# EAGLE board MRCS-Adapter-CRMI8-RJ45-Inverting-Array (EAGLE 7.7.0)
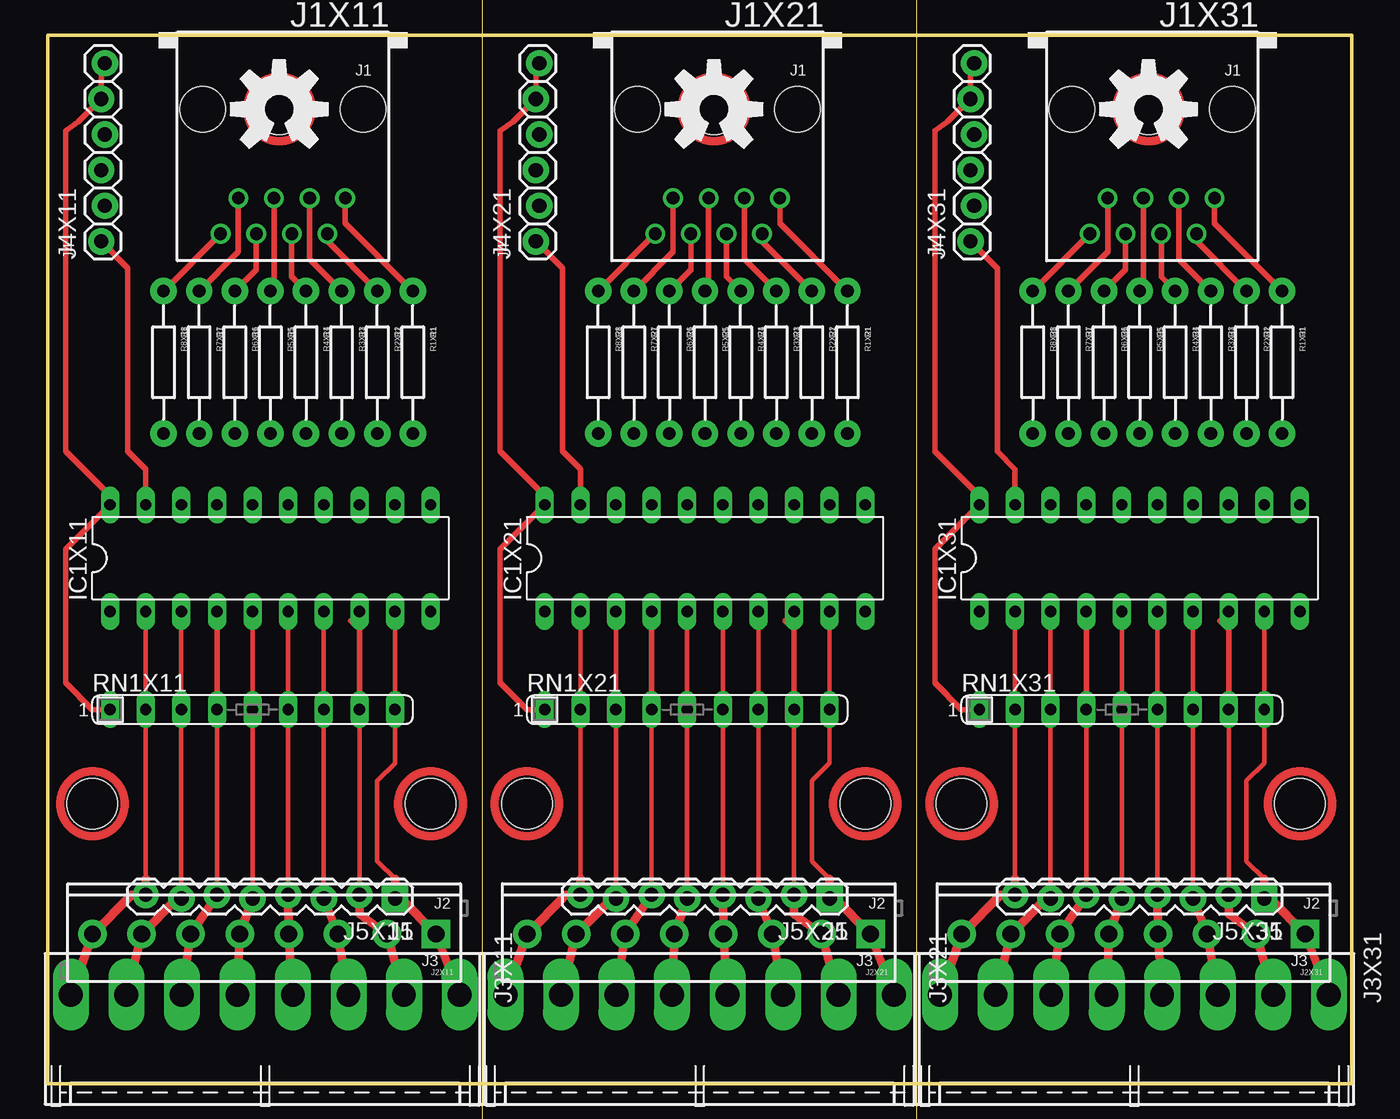
[diagram p0: board, top side]
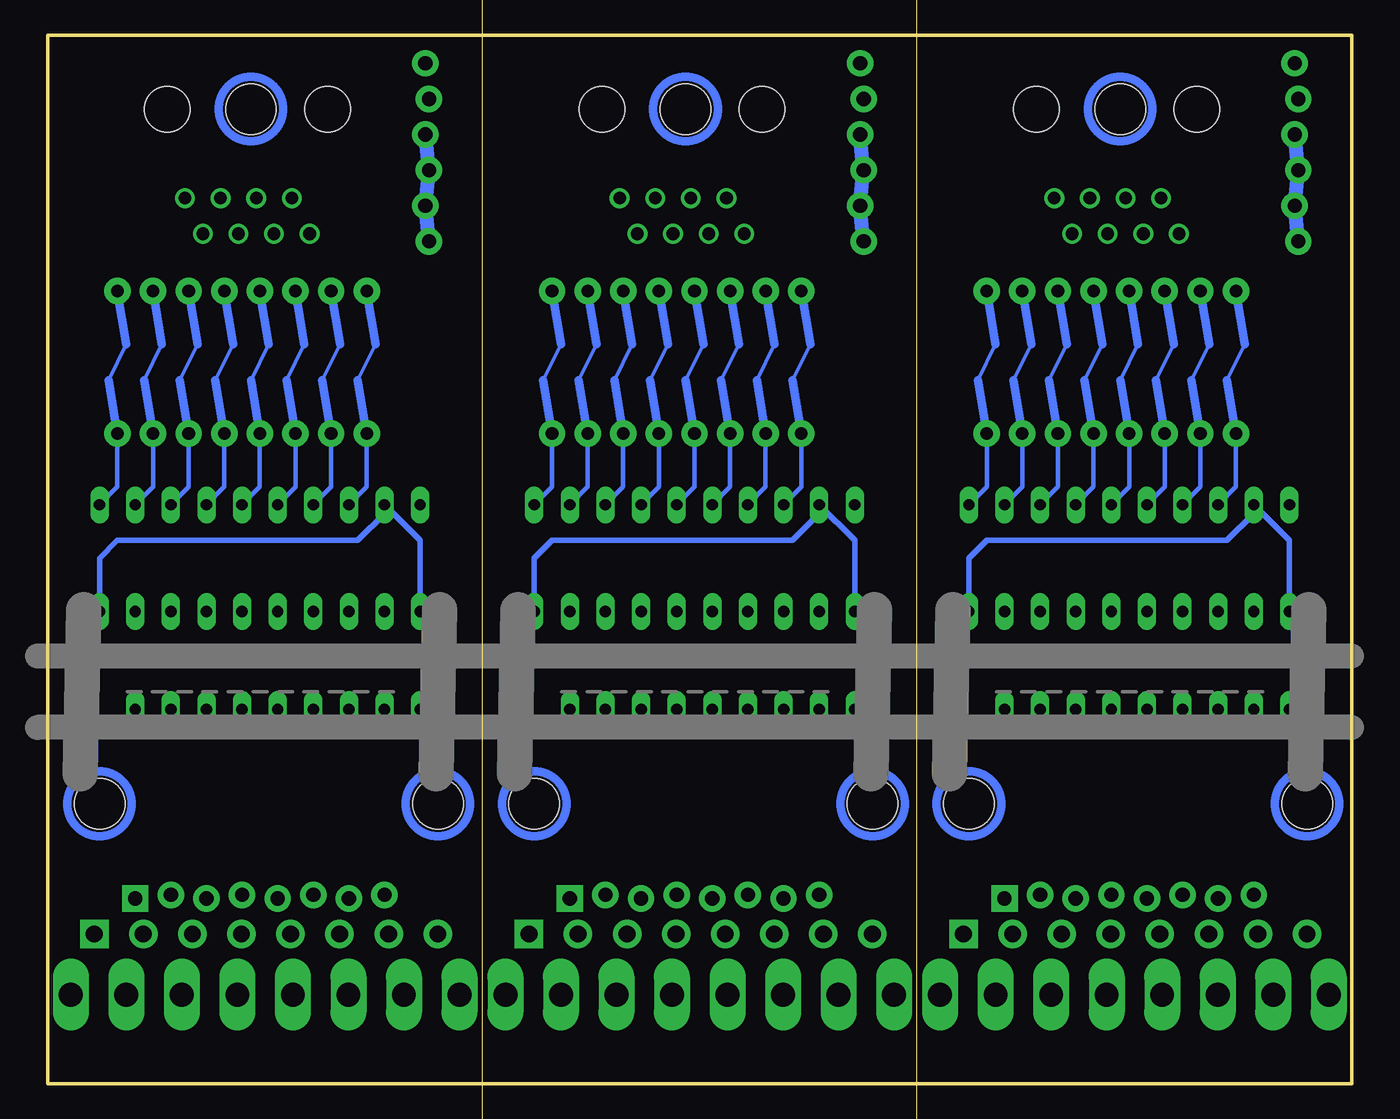
[diagram p1: board, bottom side, seen from below]

Size 93 x 74.77 mm. Coordinates in mm from the lower left corner, seen from the top.
Outline: 0,0 93,0 93,74.77 0,74.77 0,0
Copper layers (1*16): Top 0.035mm / dielectric 1.5mm / Bottom 0.035mm
Design rules "default": minimum track width 10mil, minimum drill 24mil, track to track 8mil, track to pad 8mil, pad to pad 8mil, via to via 8mil, smd to smd 8mil, copper to edge 40mil, drill to drill 8mil, minimum pad ring 10mil, minimum via ring 8mil, stop-mask expansion 4mil, vias tented up to drill 0mil, thermal gap 10mil
Milling: 2 lines

## Footprints (pad centres in the part's own frame; a part is rotated, then mirrored left to right if it is on the bottom)
DIL20 = drill 0.813 long: 1 -11.43,-3.81; 2 -8.89,-3.81; 3 -6.35,-3.81; 4 -3.81,-3.81; 5 -1.27,-3.81; 6 1.27,-3.81; 7 3.81,-3.81; 8 6.35,-3.81; 9 8.89,-3.81; 10 11.43,-3.81; 11 11.43,3.81; 12 8.89,3.81; 13 6.35,3.81; 14 3.81,3.81; 15 1.27,3.81; 16 -1.27,3.81; 17 -3.81,3.81; 18 -6.35,3.81; 19 -8.89,3.81; 20 -11.43,3.81
RJ45-NO-SHIELD = drill 0.9 pad 1.4: 1 -4.445,6.35; 2 -3.175,8.89; 3 -1.905,6.35; 4 -0.635,8.89; 5 0.635,6.35; 6 1.905,8.89; 7 3.175,6.35; 8 4.445,8.89 | hole 3.251: -5.715,0; 5.715,0
SCREWTERMINAL-3.5MM-8 = drill 1.2 pad 2.032 square: 1 0,0 | drill 1.2 pad 2.032: 2 3.5,0; 3 7,0; 4 10.5,0; 5 14,0; 6 17.5,0; 7 21,0; 8 24.5,0
KK-156-8-F = drill 1.7 pad 2.184 long: 1 -13.86,0; 2 -9.9,0; 3 -5.94,0; 4 -1.98,0; 5 1.98,0; 6 5.94,0; 7 9.9,0; 8 13.86,0
1X06_LOCK = drill 1.016 pad 1.88: 1 0,0; 2 2.54,-0.254; 3 5.08,0; 4 7.62,-0.254; 5 10.16,0; 6 12.7,-0.254
1X08_LOCK = drill 1.016 pad 1.88 square: 1 0,0.127 | drill 1.016 pad 1.88: 2 2.54,-0.127; 3 5.08,0.127; 4 7.62,-0.127; 5 10.16,0.127; 6 12.7,-0.127; 7 15.24,0.127; 8 17.78,-0.127
MOUNTINGHOLE = hole 3.6: 0,0
AXIAL-0.4-RES = drill 0.9 pad 1.88: P$1 -5.08,0; P$2 5.08,0
SIL9 = drill 0.813 long: 1 -10.16,0; 2 -7.62,0; 3 -5.08,0; 4 -2.54,0; 5 0,0; 6 2.54,0; 7 5.08,0; 8 7.62,0; 9 10.16,0

## Placement (x,y rotation side)
IC1X11  74LS540N  [DIL20]  15.88,37.47 0 top
IC1X21  74LS540N  [DIL20]  46.88,37.47 0 top
IC1X31  74LS540N  [DIL20]  77.88,37.47 0 top
J1X11  RJ45  [RJ45-NO-SHIELD]  16.77,69.48 180 top
J1X21  RJ45  [RJ45-NO-SHIELD]  47.77,69.48 180 top
J1X31  RJ45  [RJ45-NO-SHIELD]  78.77,69.48 180 top
J2X11  [SCREWTERMINAL-3.5MM-8]  27.69,10.67 180 top
J2X21  [SCREWTERMINAL-3.5MM-8]  58.69,10.67 180 top
J2X31  [SCREWTERMINAL-3.5MM-8]  89.69,10.67 180 top
J3X11  [KK-156-8-F]  15.5,6.35 180 top
J3X21  [KK-156-8-F]  46.5,6.35 180 top
J3X31  [KK-156-8-F]  77.5,6.35 180 top
J4X11  [1X06_LOCK]  3.81,60.05 90 top
J4X21  [1X06_LOCK]  34.81,60.05 90 top
J4X31  [1X06_LOCK]  65.81,60.05 90 top
J5X11  [1X08_LOCK]  24.77,13.34 180 top
J5X21  [1X08_LOCK]  55.77,13.34 180 top
J5X31  [1X08_LOCK]  86.77,13.34 180 top
M1X11  MOUNTINGHOLE  [MOUNTINGHOLE]  16.51,69.48 0 top
M1X21  MOUNTINGHOLE  [MOUNTINGHOLE]  47.51,69.48 0 top
M1X31  MOUNTINGHOLE  [MOUNTINGHOLE]  78.51,69.48 0 top
M2X11  MOUNTINGHOLE  [MOUNTINGHOLE]  27.3,19.95 0 top
M2X21  MOUNTINGHOLE  [MOUNTINGHOLE]  58.3,19.95 0 top
M2X31  MOUNTINGHOLE  [MOUNTINGHOLE]  89.31,19.95 0 top
M3X11  MOUNTINGHOLE  [MOUNTINGHOLE]  3.17,19.95 0 top
M3X21  MOUNTINGHOLE  [MOUNTINGHOLE]  34.17,19.95 0 top
M3X31  MOUNTINGHOLE  [MOUNTINGHOLE]  65.17,19.95 0 top
R1X11  [AXIAL-0.4-RES]  26.04,51.44 270 top
R1X21  [AXIAL-0.4-RES]  57.03,51.44 270 top
R1X31  [AXIAL-0.4-RES]  88.03,51.44 270 top
R2X11  [AXIAL-0.4-RES]  23.5,51.44 270 top
R2X21  [AXIAL-0.4-RES]  54.49,51.44 270 top
R2X31  [AXIAL-0.4-RES]  85.5,51.44 270 top
R3X11  [AXIAL-0.4-RES]  20.95,51.44 270 top
R3X21  [AXIAL-0.4-RES]  51.95,51.44 270 top
R3X31  [AXIAL-0.4-RES]  82.95,51.44 270 top
R4X11  [AXIAL-0.4-RES]  18.41,51.44 270 top
R4X21  [AXIAL-0.4-RES]  49.41,51.44 270 top
R4X31  [AXIAL-0.4-RES]  80.42,51.44 270 top
R5X11  [AXIAL-0.4-RES]  15.88,51.44 270 top
R5X21  [AXIAL-0.4-RES]  46.88,51.44 270 top
R5X31  [AXIAL-0.4-RES]  77.88,51.44 270 top
R6X11  [AXIAL-0.4-RES]  13.34,51.44 270 top
R6X21  [AXIAL-0.4-RES]  44.34,51.44 270 top
R6X31  [AXIAL-0.4-RES]  75.33,51.44 270 top
R7X11  [AXIAL-0.4-RES]  10.79,51.44 270 top
R7X21  [AXIAL-0.4-RES]  41.8,51.44 270 top
R7X31  [AXIAL-0.4-RES]  72.8,51.44 270 top
R8X11  [AXIAL-0.4-RES]  8.26,51.44 270 top
R8X21  [AXIAL-0.4-RES]  39.26,51.44 270 top
R8X31  [AXIAL-0.4-RES]  70.25,51.44 270 top
RN1X11  4.7K  [SIL9]  14.61,26.67 0 top
RN1X21  4.7K  [SIL9]  45.6,26.67 0 top
RN1X31  4.7K  [SIL9]  76.61,26.67 0 top
U$1X11  DOC-OSHW-LOGO-L  [OSHW-LOGO-L]  16.51,69.48 0 top
U$1X21  DOC-OSHW-LOGO-L  [OSHW-LOGO-L]  47.51,69.48 0 top
U$1X31  DOC-OSHW-LOGO-L  [OSHW-LOGO-L]  78.51,69.48 0 top
U$2X11  [CA-PROP65WARNING]  19.68,50.8 0 top
U$2X21  [CA-PROP65WARNING]  50.69,50.8 0 top
U$2X31  [CA-PROP65WARNING]  81.69,50.8 0 top

## Library data of the parts
IC1X11 IC1X21 IC1X31 = 74xx-us
J1X11 J1X21 J1X31 J2X11 J2X21 J2X31 J3X11 J3X21 J3X31 J4X11 J4X21 J4X31 J5X11 J5X21 J5X31 M1X11 M1X21 M1X31 M2X11 M2X21 M2X31 M3X11 M3X21 M3X31 R1X11 R1X21 R1X31 R2X11 R2X21 R2X31 R3X11 R3X21 R3X31 R4X11 R4X21 R4X31 R5X11 R5X21 R5X31 R6X11 R6X21 R6X31 R7X11 R7X21 R7X31 R8X11 R8X21 R8X31 U$1X11 U$1X21 U$1X31 = SPCoast
RN1X11 RN1X21 RN1X31 = resistor-sil
U$2X11 U$2X21 U$2X31 = MRCS-prop65warningBtm

## Nets
GNDX11: IC1X11.1 IC1X11.10 IC1X11.19 J4X11.1 J4X11.2 J4X11.3 J4X11.4
GNDX21: IC1X21.1 IC1X21.10 IC1X21.19 J4X21.1 J4X21.2 J4X21.3 J4X21.4
GNDX31: IC1X31.1 IC1X31.10 IC1X31.19 J4X31.1 J4X31.2 J4X31.3 J4X31.4
L1X11: IC1X11.9 J2X11.1 J3X11.1 J5X11.1 RN1X11.9
L1X21: IC1X21.9 J2X21.1 J3X21.1 J5X21.1 RN1X21.9
L1X31: IC1X31.9 J2X31.1 J3X31.1 J5X31.1 RN1X31.9
L2X11: IC1X11.8 J2X11.2 J3X11.2 J5X11.2 RN1X11.8
L2X21: IC1X21.8 J2X21.2 J3X21.2 J5X21.2 RN1X21.8
L2X31: IC1X31.8 J2X31.2 J3X31.2 J5X31.2 RN1X31.8
L3X11: IC1X11.7 J2X11.3 J3X11.3 J5X11.3 RN1X11.7
L3X21: IC1X21.7 J2X21.3 J3X21.3 J5X21.3 RN1X21.7
L3X31: IC1X31.7 J2X31.3 J3X31.3 J5X31.3 RN1X31.7
L4X11: IC1X11.6 J2X11.4 J3X11.4 J5X11.4 RN1X11.6
L4X21: IC1X21.6 J2X21.4 J3X21.4 J5X21.4 RN1X21.6
L4X31: IC1X31.6 J2X31.4 J3X31.4 J5X31.4 RN1X31.6
L5X11: IC1X11.5 J2X11.5 J3X11.5 J5X11.5 RN1X11.5
L5X21: IC1X21.5 J2X21.5 J3X21.5 J5X21.5 RN1X21.5
L5X31: IC1X31.5 J2X31.5 J3X31.5 J5X31.5 RN1X31.5
L6X11: IC1X11.4 J2X11.6 J3X11.6 J5X11.6 RN1X11.4
L6X21: IC1X21.4 J2X21.6 J3X21.6 J5X21.6 RN1X21.4
L6X31: IC1X31.4 J2X31.6 J3X31.6 J5X31.6 RN1X31.4
L7X11: IC1X11.3 J2X11.7 J3X11.7 J5X11.7 RN1X11.3
L7X21: IC1X21.3 J2X21.7 J3X21.7 J5X21.7 RN1X21.3
L7X31: IC1X31.3 J2X31.7 J3X31.7 J5X31.7 RN1X31.3
L8X11: IC1X11.2 J2X11.8 J3X11.8 J5X11.8 RN1X11.2
L8X21: IC1X21.2 J2X21.8 J3X21.8 J5X21.8 RN1X21.2
L8X31: IC1X31.2 J2X31.8 J3X31.8 J5X31.8 RN1X31.2
N$2X11: IC1X11.18 J1X11.8 R8X11.P$1 R8X11.P$2
N$2X21: IC1X21.18 J1X21.8 R8X21.P$1 R8X21.P$2
N$2X31: IC1X31.18 J1X31.8 R8X31.P$1 R8X31.P$2
N$3X11: IC1X11.17 J1X11.7 R7X11.P$1 R7X11.P$2
N$3X21: IC1X21.17 J1X21.7 R7X21.P$1 R7X21.P$2
N$3X31: IC1X31.17 J1X31.7 R7X31.P$1 R7X31.P$2
N$4X11: IC1X11.16 J1X11.6 R6X11.P$1 R6X11.P$2
N$4X21: IC1X21.16 J1X21.6 R6X21.P$1 R6X21.P$2
N$4X31: IC1X31.16 J1X31.6 R6X31.P$1 R6X31.P$2
N$5X11: IC1X11.15 J1X11.5 R5X11.P$1 R5X11.P$2
N$5X21: IC1X21.15 J1X21.5 R5X21.P$1 R5X21.P$2
N$5X31: IC1X31.15 J1X31.5 R5X31.P$1 R5X31.P$2
N$6X11: IC1X11.14 J1X11.4 R4X11.P$1 R4X11.P$2
N$6X21: IC1X21.14 J1X21.4 R4X21.P$1 R4X21.P$2
N$6X31: IC1X31.14 J1X31.4 R4X31.P$1 R4X31.P$2
N$7X11: IC1X11.13 J1X11.3 R3X11.P$1 R3X11.P$2
N$7X21: IC1X21.13 J1X21.3 R3X21.P$1 R3X21.P$2
N$7X31: IC1X31.13 J1X31.3 R3X31.P$1 R3X31.P$2
N$8X11: IC1X11.12 J1X11.2 R2X11.P$1 R2X11.P$2
N$8X21: IC1X21.12 J1X21.2 R2X21.P$1 R2X21.P$2
N$8X31: IC1X31.12 J1X31.2 R2X31.P$1 R2X31.P$2
N$9X11: IC1X11.11 J1X11.1 R1X11.P$1 R1X11.P$2
N$9X21: IC1X21.11 J1X21.1 R1X21.P$1 R1X21.P$2
N$9X31: IC1X31.11 J1X31.1 R1X31.P$1 R1X31.P$2
VCCX11: IC1X11.20 J4X11.5 J4X11.6 RN1X11.1
VCCX21: IC1X21.20 J4X21.5 J4X21.6 RN1X21.1
VCCX31: IC1X31.20 J4X31.5 J4X31.6 RN1X31.1

## Tracks (layer width: path | path; a pad name or v marks a point on that pad's centre or on a via)
GNDX11
  Top 0.406: IC1X11.19 6.99,43.81 5.71,45.09 5.71,58.15 J4X11.1
  Bottom 0.406: IC1X11.1 4.45,38.73 IC1X11.19 6.99,40.64 8.89,38.73 26.04,38.73 27.3,37.47 IC1X11.10
  Bottom 1.016: J4X11.1 J4X11.2 J4X11.3 J4X11.4
GNDX21
  Top 0.406: IC1X21.19 37.98,43.81 36.72,45.09 36.72,58.15 J4X21.1
  Bottom 0.406: IC1X21.1 35.45,38.73 IC1X21.19 37.98,40.64 39.89,38.73 57.03,38.73 58.3,37.47 IC1X21.10
  Bottom 1.016: J4X21.1 J4X21.2 J4X21.3 J4X21.4
GNDX31
  Top 0.406: IC1X31.19 68.98,43.81 67.72,45.09 67.72,58.15 J4X31.1
  Bottom 0.406: IC1X31.1 66.44,38.73 IC1X31.19 68.98,40.64 70.89,38.73 88.03,38.73 89.31,37.47 IC1X31.10
  Bottom 1.016: J4X31.1 J4X31.2 J4X31.3 J4X31.4
L1X11
  Top 0.305: IC1X11.9 24.77,27.3 | RN1X11.9 24.77,22.86 23.5,21.59 23.5,15.88 24.77,14.61
  Top 0.406: RN1X11.9 24.77,27.3
  Top 0.61: J3X11.1 J2X11.1 25.15,13.21 J5X11.1 24.77,14.61
L1X21
  Top 0.305: IC1X21.9 55.77,27.3 | RN1X21.9 55.77,22.86 54.49,21.59 54.49,15.88 55.77,14.61
  Top 0.406: RN1X21.9 55.77,27.3
  Top 0.61: J3X21.1 J2X21.1 56.15,13.21 J5X21.1 55.77,14.61
L1X31
  Top 0.305: IC1X31.9 86.77,27.3 | RN1X31.9 86.77,22.86 85.5,21.59 85.5,15.88 86.77,14.61
  Top 0.406: RN1X31.9 86.77,27.3
  Top 0.61: J3X31.1 J2X31.1 87.15,13.21 J5X31.1 86.77,14.61
L2X11
  Top 0.305: IC1X11.8 22.23,32.38 | RN1X11.8 J5X11.2
  Top 0.406: RN1X11.8 22.23,32.38 21.59,33.02
  Top 0.61: J3X11.2 J2X11.2 22.23,12.06 J5X11.2
L2X21
  Top 0.305: IC1X21.8 53.23,32.38 | RN1X21.8 J5X21.2
  Top 0.406: RN1X21.8 53.23,32.38 52.59,33.02
  Top 0.61: J3X21.2 J2X21.2 53.23,12.06 J5X21.2
L2X31
  Top 0.305: IC1X31.8 84.22,32.38 | RN1X31.8 J5X31.2
  Top 0.406: RN1X31.8 84.22,32.38 83.59,33.02
  Top 0.61: J3X31.2 J2X31.2 84.22,12.06 J5X31.2
L3X11
  Top 0.305: IC1X11.7 RN1X11.7 | 19.68,26.04 J5X11.3
  Top 0.406: RN1X11.7 19.68,26.04
  Top 0.61: J3X11.3 J2X11.3 19.94,12.55 | J5X11.3 19.94,12.55 | 19.68,12.81 19.94,12.55
L3X21
  Top 0.305: IC1X21.7 RN1X21.7 | 50.69,26.04 J5X21.3
  Top 0.406: RN1X21.7 50.69,26.04
  Top 0.61: J3X21.3 J2X21.3 50.94,12.55 | J5X21.3 50.94,12.55 | 50.69,12.81 50.94,12.55
L3X31
  Top 0.305: IC1X31.7 RN1X31.7 | 81.69,26.04 J5X31.3
  Top 0.406: RN1X31.7 81.69,26.04
  Top 0.61: J3X31.3 J2X31.3 81.94,12.55 | J5X31.3 81.94,12.55 | 81.69,12.81 81.94,12.55
L4X11
  Top 0.305: IC1X11.6 RN1X11.6 | 17.14,26.04 J5X11.4
  Top 0.406: RN1X11.6 17.14,26.04
  Top 0.61: J3X11.4 J2X11.4 J5X11.4
L4X21
  Top 0.305: IC1X21.6 RN1X21.6 | 48.15,26.04 J5X21.4
  Top 0.406: RN1X21.6 48.15,26.04
  Top 0.61: J3X21.4 J2X21.4 J5X21.4
L4X31
  Top 0.305: IC1X31.6 RN1X31.6 | 79.14,26.04 J5X31.4
  Top 0.406: RN1X31.6 79.14,26.04
  Top 0.61: J3X31.4 J2X31.4 J5X31.4
L5X11
  Top 0.305: IC1X11.5 RN1X11.5 | 14.61,26.04 J5X11.5
  Top 0.406: RN1X11.5 14.61,26.04
  Top 0.61: J3X11.5 J2X11.5 J5X11.5
L5X21
  Top 0.305: IC1X21.5 RN1X21.5 | 45.6,26.04 J5X21.5
  Top 0.406: RN1X21.5 45.6,26.04
  Top 0.61: J3X21.5 J2X21.5 J5X21.5
L5X31
  Top 0.305: IC1X31.5 RN1X31.5 | 76.61,26.04 J5X31.5
  Top 0.406: RN1X31.5 76.61,26.04
  Top 0.61: J3X31.5 J2X31.5 J5X31.5
L6X11
  Top 0.305: IC1X11.4 12.06,32.38 | RN1X11.4 J5X11.6
  Top 0.406: RN1X11.4 12.06,32.38
  Top 0.61: J3X11.6 J2X11.6 J5X11.6
L6X21
  Top 0.305: IC1X21.4 43.06,32.38 | RN1X21.4 J5X21.6
  Top 0.406: RN1X21.4 43.06,32.38
  Top 0.61: J3X21.6 J2X21.6 J5X21.6
L6X31
  Top 0.305: IC1X31.4 74.06,32.38 | RN1X31.4 J5X31.6
  Top 0.406: RN1X31.4 74.06,32.38
  Top 0.61: J3X31.6 J2X31.6 J5X31.6
L7X11
  Top 0.305: IC1X11.3 9.53,27.3 | RN1X11.3 J5X11.7
  Top 0.406: RN1X11.3 9.53,27.3
  Top 0.61: J3X11.7 J2X11.7 9.23,13.21 J5X11.7
L7X21
  Top 0.305: IC1X21.3 40.52,27.3 | RN1X21.3 J5X21.7
  Top 0.406: RN1X21.3 40.52,27.3
  Top 0.61: J3X21.7 J2X21.7 40.23,13.21 J5X21.7
L7X31
  Top 0.305: IC1X31.3 71.53,27.3 | RN1X31.3 J5X31.7
  Top 0.406: RN1X31.3 71.53,27.3
  Top 0.61: J3X31.7 J2X31.7 71.23,13.21 J5X31.7
L8X11
  Top 0.305: IC1X11.2 RN1X11.2 | 6.99,26.04 6.99,13.97
  Top 0.406: RN1X11.2 6.99,26.04
  Top 0.61: J3X11.8 J2X11.8 5.98,13.46 J5X11.8 6.99,13.97 6.99,14.61
L8X21
  Top 0.305: IC1X21.2 RN1X21.2 | 37.98,26.04 37.98,13.97
  Top 0.406: RN1X21.2 37.98,26.04
  Top 0.61: J3X21.8 J2X21.8 36.98,13.46 J5X21.8 37.98,13.97 37.98,14.61
L8X31
  Top 0.305: IC1X31.2 RN1X31.2 | 68.98,26.04 68.98,13.97
  Top 0.406: RN1X31.2 68.98,26.04
  Top 0.61: J3X31.8 J2X31.8 67.98,13.46 J5X31.8 68.98,13.97 68.98,14.61
N$2X11
  Top 0.406: J1X11.8 R8X11.P$1
  Bottom 0.254: 7.62,52.7 8.89,50.16
  Bottom 0.305: R8X11.P$2 8.26,42.55 IC1X11.18
  Bottom 0.61: R8X11.P$1 7.62,52.7 | R8X11.P$2 8.89,50.16
N$2X21
  Top 0.406: J1X21.8 R8X21.P$1
  Bottom 0.254: 38.62,52.7 39.89,50.16
  Bottom 0.305: R8X21.P$2 39.26,42.55 IC1X21.18
  Bottom 0.61: R8X21.P$1 38.62,52.7 | R8X21.P$2 39.89,50.16
N$2X31
  Top 0.406: J1X31.8 R8X31.P$1
  Bottom 0.254: 69.62,52.7 70.89,50.16
  Bottom 0.305: R8X31.P$2 70.25,42.55 IC1X31.18
  Bottom 0.61: R8X31.P$1 69.62,52.7 | R8X31.P$2 70.89,50.16
N$3X11
  Top 0.406: J1X11.7 13.6,59.31 R7X11.P$1
  Bottom 0.254: 10.16,52.7 11.43,50.16
  Bottom 0.305: R7X11.P$2 10.79,42.55 IC1X11.17
  Bottom 0.61: R7X11.P$1 10.16,52.7 | R7X11.P$2 11.43,50.16
N$3X21
  Top 0.406: J1X21.7 44.59,59.31 R7X21.P$1
  Bottom 0.254: 41.16,52.7 42.43,50.16
  Bottom 0.305: R7X21.P$2 41.8,42.55 IC1X21.17
  Bottom 0.61: R7X21.P$1 41.16,52.7 | R7X21.P$2 42.43,50.16
N$3X31
  Top 0.406: J1X31.7 75.59,59.31 R7X31.P$1
  Bottom 0.254: 72.16,52.7 73.43,50.16
  Bottom 0.305: R7X31.P$2 72.8,42.55 IC1X31.17
  Bottom 0.61: R7X31.P$1 72.16,52.7 | R7X31.P$2 73.43,50.16
N$4X11
  Top 0.406: J1X11.6 14.87,58.05 R6X11.P$1
  Bottom 0.254: 12.7,52.7 13.97,50.16
  Bottom 0.305: R6X11.P$2 13.34,42.55 IC1X11.16
  Bottom 0.61: R6X11.P$1 12.7,52.7 | R6X11.P$2 13.97,50.16
N$4X21
  Top 0.406: J1X21.6 45.87,58.05 R6X21.P$1
  Bottom 0.254: 43.7,52.7 44.97,50.16
  Bottom 0.305: R6X21.P$2 44.34,42.55 IC1X21.16
  Bottom 0.61: R6X21.P$1 43.7,52.7 | R6X21.P$2 44.97,50.16
N$4X31
  Top 0.406: J1X31.6 76.86,58.05 R6X31.P$1
  Bottom 0.254: 74.7,52.7 75.97,50.16
  Bottom 0.305: R6X31.P$2 75.33,42.55 IC1X31.16
  Bottom 0.61: R6X31.P$1 74.7,52.7 | R6X31.P$2 75.97,50.16
N$5X11
  Top 0.406: J1X11.5 16.14,56.77 R5X11.P$1
  Bottom 0.254: 15.24,52.7 16.51,50.16
  Bottom 0.305: R5X11.P$2 15.88,42.55 IC1X11.15
  Bottom 0.61: R5X11.P$1 15.24,52.7 | R5X11.P$2 16.51,50.16
N$5X21
  Top 0.406: J1X21.5 47.13,56.77 R5X21.P$1
  Bottom 0.254: 46.24,52.7 47.51,50.16
  Bottom 0.305: R5X21.P$2 46.88,42.55 IC1X21.15
  Bottom 0.61: R5X21.P$1 46.24,52.7 | R5X21.P$2 47.51,50.16
N$5X31
  Top 0.406: J1X31.5 78.14,56.77 R5X31.P$1
  Bottom 0.254: 77.24,52.7 78.51,50.16
  Bottom 0.305: R5X31.P$2 77.88,42.55 IC1X31.15
  Bottom 0.61: R5X31.P$1 77.24,52.7 | R5X31.P$2 78.51,50.16
N$6X11
  Top 0.406: J1X11.4 17.41,57.52 R4X11.P$1
  Bottom 0.254: 17.78,52.7 19.05,50.16
  Bottom 0.305: R4X11.P$2 18.41,42.55 IC1X11.14
  Bottom 0.61: R4X11.P$1 17.78,52.7 | R4X11.P$2 19.05,50.16
N$6X21
  Top 0.406: J1X21.4 48.41,57.52 R4X21.P$1
  Bottom 0.254: 48.78,52.7 50.05,50.16
  Bottom 0.305: R4X21.P$2 49.41,42.55 IC1X21.14
  Bottom 0.61: R4X21.P$1 48.78,52.7 | R4X21.P$2 50.05,50.16
N$6X31
  Top 0.406: J1X31.4 79.41,57.52 R4X31.P$1
  Bottom 0.254: 79.78,52.7 81.05,50.16
  Bottom 0.305: R4X31.P$2 80.42,42.55 IC1X31.14
  Bottom 0.61: R4X31.P$1 79.78,52.7 | R4X31.P$2 81.05,50.16
N$7X11
  Top 0.406: J1X11.3 18.68,58.8 R3X11.P$1
  Bottom 0.254: 20.32,52.7 21.59,50.16
  Bottom 0.305: R3X11.P$2 20.95,42.55 IC1X11.13
  Bottom 0.61: R3X11.P$1 20.32,52.7 | R3X11.P$2 21.59,50.16
N$7X21
  Top 0.406: J1X21.3 49.67,58.8 R3X21.P$1
  Bottom 0.254: 51.32,52.7 52.59,50.16
  Bottom 0.305: R3X21.P$2 51.95,42.55 IC1X21.13
  Bottom 0.61: R3X21.P$1 51.32,52.7 | R3X21.P$2 52.59,50.16
N$7X31
  Top 0.406: J1X31.3 80.67,58.8 R3X31.P$1
  Bottom 0.254: 82.32,52.7 83.59,50.16
  Bottom 0.305: R3X31.P$2 82.95,42.55 IC1X31.13
  Bottom 0.61: R3X31.P$1 82.32,52.7 | R3X31.P$2 83.59,50.16
N$8X11
  Top 0.406: J1X11.2 19.95,60.06 R2X11.P$1
  Bottom 0.254: 22.86,52.7 24.13,50.16
  Bottom 0.305: R2X11.P$2 23.5,42.55 IC1X11.12
  Bottom 0.61: R2X11.P$1 22.86,52.7 | R2X11.P$2 24.13,50.16
N$8X21
  Top 0.406: J1X21.2 50.95,60.06 R2X21.P$1
  Bottom 0.254: 53.86,52.7 55.13,50.16
  Bottom 0.305: R2X21.P$2 54.49,42.55 IC1X21.12
  Bottom 0.61: R2X21.P$1 53.86,52.7 | R2X21.P$2 55.13,50.16
N$8X31
  Top 0.406: J1X31.2 81.94,60.06 R2X31.P$1
  Bottom 0.254: 84.86,52.7 86.13,50.16
  Bottom 0.305: R2X31.P$2 85.5,42.55 IC1X31.12
  Bottom 0.61: R2X31.P$1 84.86,52.7 | R2X31.P$2 86.13,50.16
N$9X11
  Top 0.406: J1X11.1 21.21,61.34 R1X11.P$1
  Bottom 0.254: 25.4,52.7 26.67,50.16
  Bottom 0.305: R1X11.P$2 26.04,42.55 IC1X11.11
  Bottom 0.61: R1X11.P$1 25.4,52.7 | R1X11.P$2 26.67,50.16
N$9X21
  Top 0.406: J1X21.1 52.22,61.34 R1X21.P$1
  Bottom 0.254: 56.4,52.7 57.67,50.16
  Bottom 0.305: R1X21.P$2 57.03,42.55 IC1X21.11
  Bottom 0.61: R1X21.P$1 56.4,52.7 | R1X21.P$2 57.67,50.16
N$9X31
  Top 0.406: J1X31.1 83.22,61.34 R1X31.P$1
  Bottom 0.254: 87.4,52.7 88.67,50.16
  Bottom 0.305: R1X31.P$2 88.03,42.55 IC1X31.11
  Bottom 0.61: R1X31.P$1 87.4,52.7 | R1X31.P$2 88.67,50.16
VCCX11
  Top 0.406: J4X11.6 3.81,72.5 J4X11.5 2.17,68.58 1.27,67.94 1.27,45.09 4.45,41.91 IC1X11.20 1.27,38.1 1.27,28.57 3.17,26.67 RN1X11.1
VCCX21
  Top 0.406: J4X21.6 34.81,72.5 J4X21.5 33.17,68.58 32.27,67.94 32.27,45.09 35.45,41.91 IC1X21.20 32.27,38.1 32.27,28.57 34.17,26.67 RN1X21.1
VCCX31
  Top 0.406: J4X31.6 65.81,72.5 J4X31.5 64.17,68.58 63.27,67.94 63.27,45.09 66.44,41.91 IC1X31.20 63.27,38.1 63.27,28.57 65.17,26.67 RN1X31.1

## Text on the board
Pads: R8 | R7 | R6 | R5 | R4 | R3 | R2 | R1 | R8 | R7 | R6 | R5 | R4 | R3 | R2 | R1 | R8 | R7 | R6 | R5 | R4 | R3 | R2 | R1 | IC1 | IC1 | IC1 | RN1 | RN1 | RN1 | J5 | J5 | J5
Milling: V-Score | V-Score
tDocu: VCC / VCC / GND / GND / GND / GND | VCC / VCC / GND / GND / GND / GND | VCC / VCC / GND / GND / GND / GND | Cut on / reverse for / Resistors | Cut on / reverse for / Resistors | Cut on / reverse for / Resistors | 8 | 8 | 8 | CMRI8-RJ45 Inverting Adapter | CMRI8-RJ45 Inverting Adapter | CMRI8-RJ45 Inverting Adapter | 2020.11 | 2020.11 | 2020.11 | v1.0 | v1.0 | v1.0 | 0.100 | 0.100 | 0.100 | 3.5mm | 3.5mm | 3.5mm | 8 | 1 | 8 | 1 | 8 | 1 | 0.156 | 0.156 | 0.156
bDocu: Solder / Side | Solder / Side | Solder / Side | SPCoast | SPCoast | SPCoast | MRCS | MRCS | MRCS | RJ45 | RJ45 | RJ45 | CMRI Accessory | CMRI Accessory | CMRI Accessory | Breakout | Breakout | Breakout | Model Railroading is fun! | Model Railroading is fun! | Model Railroading is fun! | www . SPCoast . com | www . SPCoast . com | www . SPCoast . com | Made in the PCR, Coast Division, NMRA | Made in the PCR, Coast Division, NMRA | Made in the PCR, Coast Division, NMRA
_tNames: J1 | J1 | J1 | J4 | J4 | J4 | R8 | R7 | R6 | R5 | R4 | R3 | R2 | R1 | R8 | R7 | R6 | R5 | R4 | R3 | R2 | R1 | R8 | R7 | R6 | R5 | R4 | R3 | R2 | R1 | IC1 | IC1 | IC1 | RN1 | RN1 | RN1 | J5 | J2 | J5 | J2 | J5 | J2 | J3 | J3 | J3